# EAGLE board gemschematic_Chris_edits (EAGLE 9.6.2)
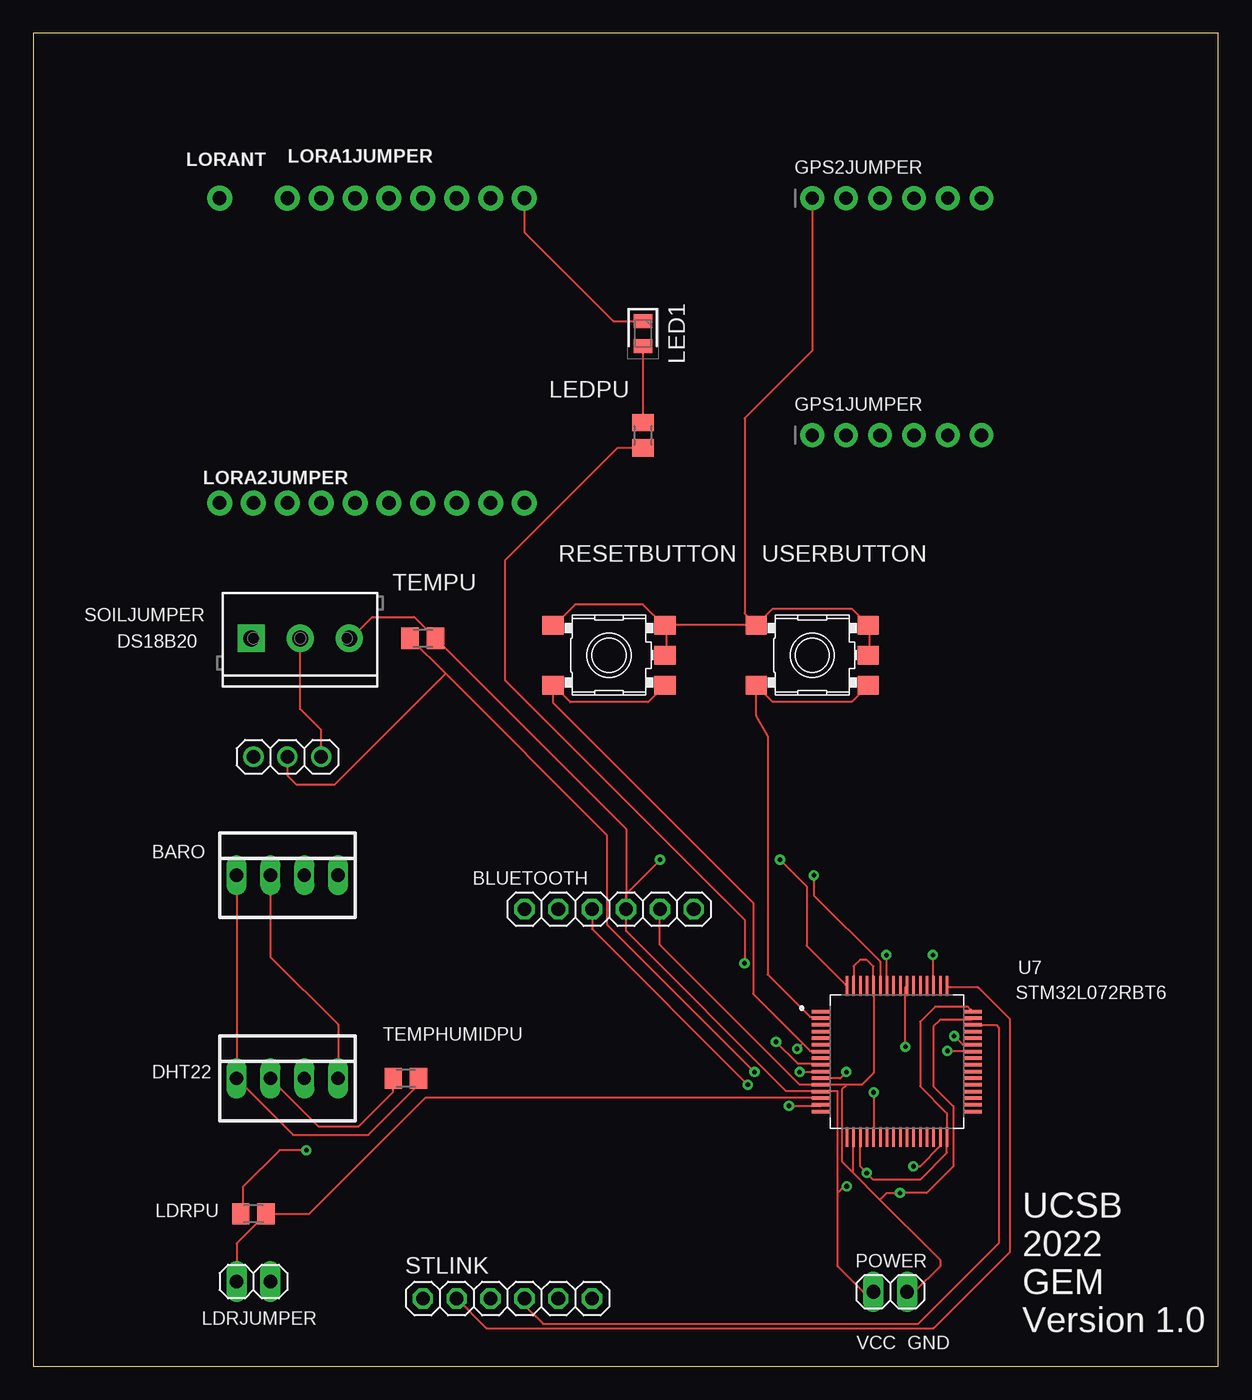
[diagram p0: board, top side]
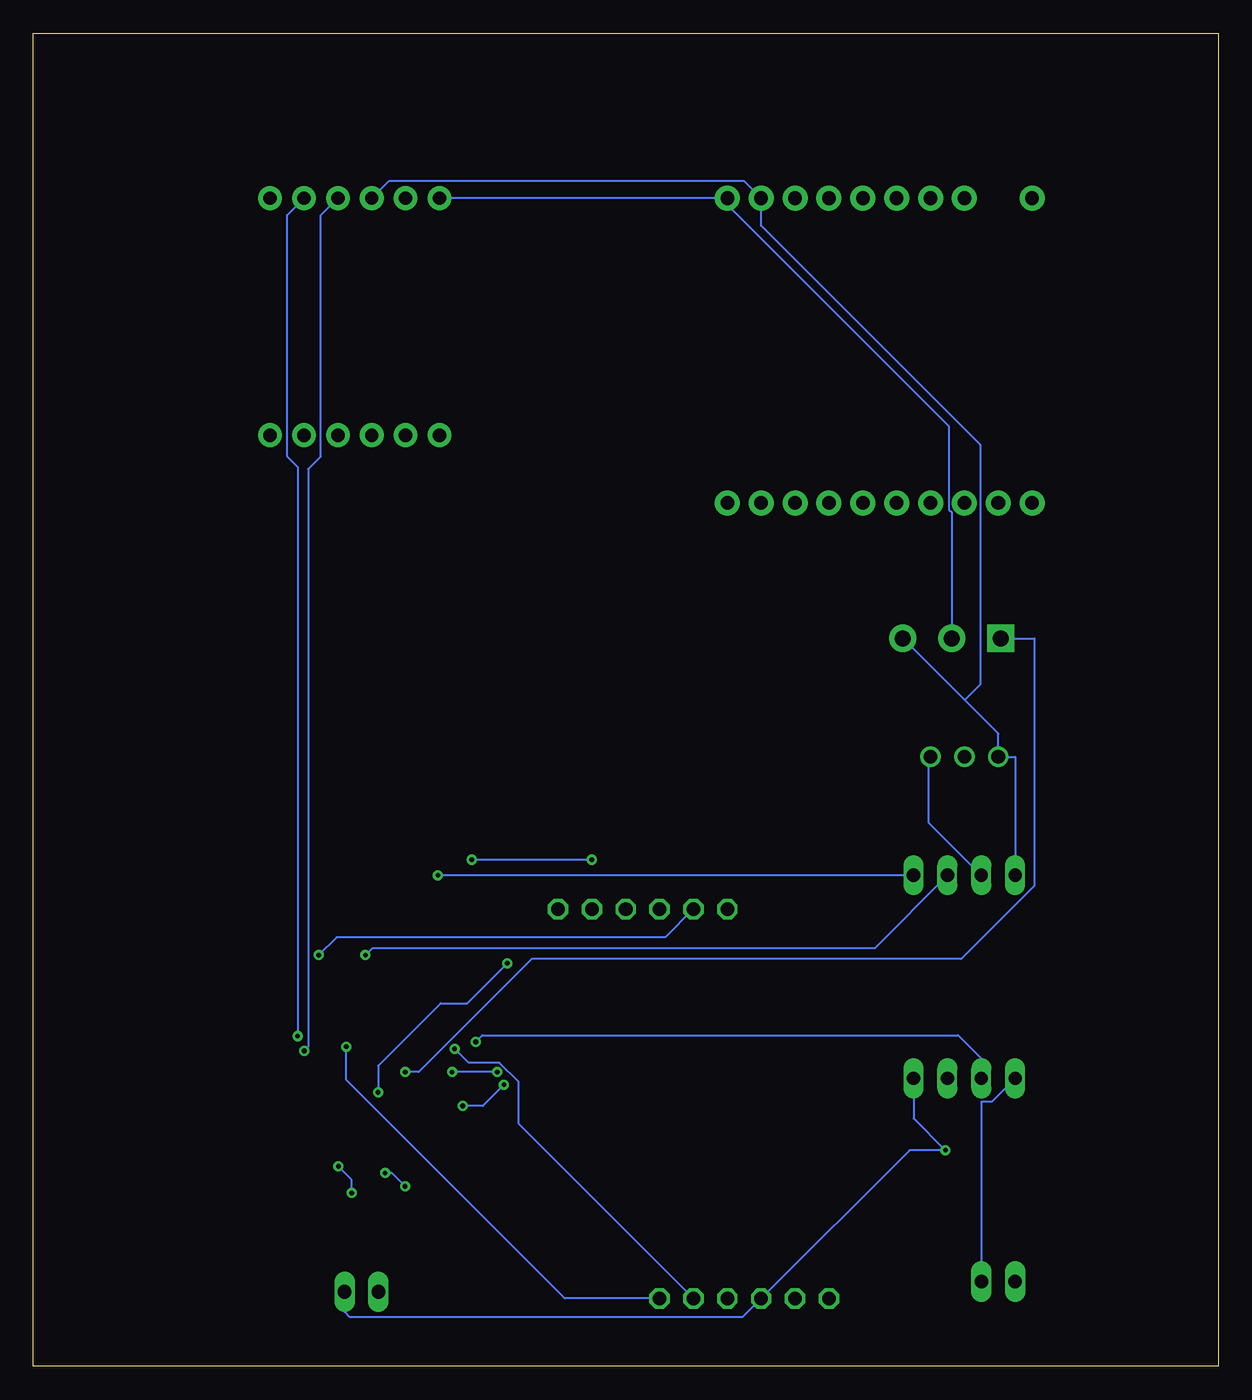
[diagram p1: board, bottom side, seen from below]

Size 88.88 x 100 mm. Coordinates in mm from the lower left corner, seen from the top.
Outline: 0,0 88.88,0 88.88,100 0,100 0,0
Copper layers (1*16): Top 0.035mm / dielectric 1.5mm / Bottom 0.035mm
Design rules "default": minimum track width 6mil, minimum drill 0.35mm, track to track 6mil, track to pad 6mil, pad to pad 6mil, via to via 6mil, smd to smd 6mil, copper to edge 40mil, drill to drill 6mil, minimum pad ring 10mil, minimum via ring 8mil, stop-mask expansion 4mil, vias tented up to drill 0mil, thermal gap 10mil
Net classes: 0 default: width 0.152 mm, drill 0.305 mm; 1 highpower: width 0.406 mm, drill 0.483 mm; 2 lowpower: width 0.305 mm, drill 0.483 mm

## Footprints (pad centres in the part's own frame; a part is rotated, then mirrored left to right if it is on the bottom)
22-23-2041 = drill 1 long: 1 -3.81,0; 2 -1.27,0; 3 1.27,0; 4 3.81,0
1X06 = drill 1.016 octagon: 1 -6.35,0; 2 -3.81,0; 3 -1.27,0; 4 1.27,0; 5 3.81,0; 6 6.35,0
1X03 = drill 1.016: 1 -2.54,0; 2 0,0; 3 2.54,0
1X06_ROUND_70 = drill 1 pad 1.778: 1 -6.35,0; 2 -3.81,0; 3 -1.27,0; 4 1.27,0; 5 3.81,0; 6 6.35,0
1X02 = drill 1.016 long: 1 -1.27,0; 2 1.27,0
M0805 = smd 1.3 x 1.6: 1 -0.95,0; 2 0.95,0
D-G080508G1-KS2_LEDC2012X85N = smd 1.05 x 1.4: 1 -0.95,0; 2 0.95,0
1X08_NO_SILK = drill 1.016 pad 1.88: 1 0,0; 2 2.54,0; 3 5.08,0; 4 7.62,0; 5 10.16,0; 6 12.7,0; 7 15.24,0; 8 17.78,0
1X10_NO_SILK = drill 1.016 pad 1.88: 1 0,0; 2 2.54,0; 3 5.08,0; 4 7.62,0; 5 10.16,0; 6 12.7,0; 7 15.24,0; 8 17.78,0; 9 20.32,0; 10 22.86,0
1X01_NO_SILK = drill 1.016 pad 1.88: 1 0,0
SKHMPXE010 = smd 1.6 x 1.4: 1 -4.2,2.25; 2 4.2,2.25; 3 -4.2,-2.25; 4 4.2,-2.25; 5 4.2,0
SCREWTERMINAL-3.5MM-3_LOCK.007S = drill 1.2 pad 2.032 square: 1 -0.178,0 | drill 1.2 pad 2.032: 2 3.5,0; 3 7.178,0
QFP50P1200X1200X160-64N = smd 1.47 x 0.25: 1 -5.67,3.75; 2 -5.67,3.25; 3 -5.67,2.75; 4 -5.67,2.25; 5 -5.67,1.75; 6 -5.67,1.25; 7 -5.67,0.75; 8 -5.67,0.25; 9 -5.67,-0.25; 10 -5.67,-0.75; 11 -5.67,-1.25; 12 -5.67,-1.75; 13 -5.67,-2.25; 14 -5.67,-2.75; 15 -5.67,-3.25; 16 -5.67,-3.75; 33 5.67,-3.75; 34 5.67,-3.25; 35 5.67,-2.75; 36 5.67,-2.25; 37 5.67,-1.75; 38 5.67,-1.25; 39 5.67,-0.75; 40 5.67,-0.25; 41 5.67,0.25; 42 5.67,0.75; 43 5.67,1.25; 44 5.67,1.75; 45 5.67,2.25; 46 5.67,2.75; 47 5.67,3.25; 48 5.67,3.75 | smd 0.25 x 1.47: 17 -3.75,-5.67; 18 -3.25,-5.67; 19 -2.75,-5.67; 20 -2.25,-5.67; 21 -1.75,-5.67; 22 -1.25,-5.67; 23 -0.75,-5.67; 24 -0.25,-5.67; 25 0.25,-5.67; 26 0.75,-5.67; 27 1.25,-5.67; 28 1.75,-5.67; 29 2.25,-5.67; 30 2.75,-5.67; 31 3.25,-5.67; 32 3.75,-5.67; 49 3.75,5.67; 50 3.25,5.67; 51 2.75,5.67; 52 2.25,5.67; 53 1.75,5.67; 54 1.25,5.67; 55 0.75,5.67; 56 0.25,5.67; 57 -0.25,5.67; 58 -0.75,5.67; 59 -1.25,5.67; 60 -1.75,5.67; 61 -2.25,5.67; 62 -2.75,5.67; 63 -3.25,5.67; 64 -3.75,5.67

## Placement (x,y rotation side)
BARO  22-23-2041  [22-23-2041]  19.05,36.83 0 top
BLUETOOTH  [1X06]  43.18,34.29 0 top
DHT22  22-23-2041  [22-23-2041]  19.05,21.59 0 top
DS18B20  [1X03]  19.05,45.72 0 top
GPS1JUMPER  [1X06_ROUND_70]  64.77,69.85 0 top
GPS2JUMPER  [1X06_ROUND_70]  64.77,87.63 0 top
LDRJUMPER  [1X02]  16.51,6.35 0 top
LDRPU  270  [M0805]  16.51,11.43 0 top
LED1  D-G080508G1-KS2_D-G080508G1-KS2  [D-G080508G1-KS2_LEDC2012X85N]  45.72,77.47 270 top
LEDPU  510 Ohm  [M0805]  45.72,69.85 90 top
LORA1JUMPER  [1X08_NO_SILK]  19.05,87.63 0 top
LORA2JUMPER  [1X10_NO_SILK]  13.97,64.77 0 top
LORANT  [1X01_NO_SILK]  13.97,87.63 0 top
POWER  [1X02]  64.27,5.58 0 top
RESETBUTTON  SKHMPSE010  [SKHMPXE010]  43.18,53.34 0 top
SOILJUMPER  [SCREWTERMINAL-3.5MM-3_LOCK.007S]  16.51,54.61 0 top
STLINK  [1X06]  35.56,5.08 0 top
TEMPHUMIDPU  4.7k  [M0805]  27.94,21.59 0 top
TEMPU  4.7k  [M0805]  29.21,54.61 0 top
U7  STM32L073RZT6  [QFP50P1200X1200X160-64N]  64.77,22.86 0 top
USERBUTTON  SKHMPSE010  [SKHMPXE010]  58.42,53.34 0 top

## Library data of the parts
BARO DHT22 = con-molex; MF: MOLEX; MPN: 22-23-2041; OC_FARNELL: 1462920; OC_NEWARK: 38C0355
BLUETOOTH DS18B20 LDRPU LEDPU STLINK TEMPHUMIDPU TEMPU = adafruit
GPS1JUMPER GPS2JUMPER = microbuilder
LDRJUMPER POWER = pinhead
LED1 = ce-capstone-2022; DESCRIPTION: Light Emitting Diodes (LED) Green 526~531nm 250~330mcd@5mA Top View 0805 RoHS; HEIGHT: 0.85mm; MANUFACTURER_NAME: Wuxi ARK Tech Elec; MANUFACTURER_PART_NUMBER: D-G080508G1-KS2
LORA1JUMPER = SparkFun-Connectors; PROD_ID: CONN-08438
LORA2JUMPER = SparkFun-Connectors; PROD_ID: CONN-11563
LORANT = SparkFun-Connectors
RESETBUTTON USERBUTTON = switch
SOILJUMPER = SparkFun-Connectors; PROD_ID: CONN-08288
U7 = STM32L073RZT6; AVAILABILITY: In Stock; DESCRIPTION: ARM® Cortex®-M0+ STM32L0 Microcontroller IC 32-Bit 32MHz 192KB (192K x 8) FLASH 64-LQFP (10x10); MF: STMicroelectronics; MP: STM32L073RZT6; PACKAGE: LQFP-64 STMicroelectronics; PRICE: None; PURCHASE-URL: https://pricing.snapeda.com/search/part/STM32L073RZT6/?ref=eda

## Nets
1PPS: GPS2JUMPER.2
BTRX: BLUETOOTH.2 U7.51
BTTX: BLUETOOTH.3 U7.15
GND: BARO.2 BLUETOOTH.5 DHT22.4 DS18B20.3 GPS2JUMPER.1 LDRPU.1 LED1.1 LORA1JUMPER.8 POWER.2 RESETBUTTON.1 RESETBUTTON.2 RESETBUTTON.5 SOILJUMPER.2 STLINK.3 U7.12 U7.18 U7.31 U7.47 U7.60 U7.63 USERBUTTON.1 USERBUTTON.2 USERBUTTON.5
GPSRX: GPS2JUMPER.4 U7.42
GPSTX: GPS2JUMPER.5 U7.43
LED: LEDPU.1 U7.21
N$1: LED1.2 LEDPU.2
NRST: RESETBUTTON.3 RESETBUTTON.4 STLINK.5 U7.7
PA0LDR: LDRJUMPER.1 LDRPU.2 U7.14
PC1DHT: DHT22.2 TEMPHUMIDPU.1 U7.9
PC2DS18B20: DS18B20.2 TEMPU.1 U7.10
PC3SOIL: SOILJUMPER.1 U7.11
SCLBARO: BARO.3 U7.58
SDABARO: BARO.4 U7.59
SWCLKSTLINK: STLINK.2 U7.49
SWDIOSTLINK: STLINK.4 U7.46
SWOSTLINK: STLINK.6 U7.55
USERBUTTON: U7.2 USERBUTTON.3 USERBUTTON.4
VCC: BARO.1 BLUETOOTH.4 DHT22.1 DS18B20.1 GPS2JUMPER.3 LDRJUMPER.2 LORA1JUMPER.7 POWER.1 SOILJUMPER.3 TEMPHUMIDPU.2 TEMPU.2 U7.13 U7.19 U7.32 U7.48 U7.64
VLCD: U7.1

## Tracks (layer width: path | path; a pad name or v marks a point on that pad's centre or on a via)
BTRX  (via drill 0.35)
  Top 0.152: v67.47,30.84 67.47,28.57 U7.51
  Bottom 0.152: v67.47,30.84 66.14,32.18 41.48,32.18 BLUETOOTH.2
BTTX  (via drill 0.35)
  Top 0.152: v56.67,19.53 59.05,19.53 U7.15 | BLUETOOTH.3 41.91,32.79 v53.59,21.11
  Bottom 0.152: v53.59,21.11 55.17,19.53 v56.67,19.53
GND  (via drill 0.35)
  Top 0.152: BLUETOOTH.5 46.99,31.59 57.47,21.11 59.05,21.11 U7.12 59.21,21.11 61,21.11 | DS18B20.3 21.59,47.72 20.01,49.3 SOILJUMPER.2 | v20.48,16.21 18.48,16.21 15.72,13.45 15.72,11.43 LDRPU.1 | USERBUTTON.5 62.71,53.34 62.71,55.56 USERBUTTON.2 61.38,56.83 55.46,56.83 USERBUTTON.1 | RESETBUTTON.1 39.05,55.56 40.64,57.15 45.72,57.15 47.28,55.59 RESETBUTTON.2 | RESETBUTTON.2 47.47,55.5 47.47,53.43 RESETBUTTON.5 | GPS2JUMPER.1 58.42,76.2 53.34,71.12 53.34,56.47 USERBUTTON.1 | USERBUTTON.1 RESETBUTTON.2 | LORA1JUMPER.8 36.83,85.09 43.5,78.42 LED1.1 | 61,21.11 62.11,21.11 63.02,22.02 63.02,28.42 U7.60 63,28.55 63,30 62.5,30.5 62,30.5 61.52,30.02 U7.63 | 61,21.11 60.64,20.76 60.64,15.35 61.5,14.5 | 61.5,14.5 63.5,12.5 | 63.5,12.5 67.49,8.5 67.5,8.5 68,8 68,7.5 66.08,5.58 POWER.2 | DHT22.4 22.86,25.64 17.78,30.72 BARO.2 | 61.5,14.5 61.5,17.17 U7.18 | 63.5,12.5 64,13 v65,13 67,13 69,15 69,19.5 67.5,21 67.5,25.5 68,26 70.33,26 U7.47 | v66,15 66.5,15 68.02,16.52 U7.31
  Bottom 0.152: GPS2JUMPER.1 LORA1JUMPER.8 36.83,87.13 20.22,70.52 20.22,64.29 20.01,64.08 SOILJUMPER.2 | BARO.2 21.75,40.8 21.75,45.72 DS18B20.3 | DHT22.4 22.86,18.59 v20.48,16.21 23.16,16.21 STLINK.3 35.7,3.67 65.14,3.67 65.54,4.08 POWER.2 | v65,13 65,14 v66,15
GPSRX  (via drill 0.35)
  Top 0.152: v68.56,23.65 70.33,23.65 U7.42
  Bottom 0.152: v68.56,23.65 68.26,23.95 68.26,67.31 67.31,68.26 67.31,86.36 GPS2JUMPER.4
GPSTX  (via drill 0.35)
  Top 0.152: v69.06,24.77 69.69,24.13 70.33,24.13 U7.43
  Bottom 0.152: v69.06,24.77 69.06,67.47 69.85,68.26 69.85,86.36 GPS2JUMPER.5
LED  (via drill 0.35)
  Top 0.152: v63.02,20.54 63.02,17.3 U7.21 | v53.34,30.23 53.34,33.5 35.4,51.44 35.4,60.48 43.82,68.9 LEDPU.1
  Bottom 0.152: v63.02,20.54 63.02,22.54 58.34,27.23 56.34,27.23 v53.34,30.23
N$1
  Top 0.152: LED1.2 LEDPU.2
NRST  (via drill 0.35)
  Top 0.152: 57.69,24.22 53.98,27.94 53.98,34.77 38.98,49.76 RESETBUTTON.3 40.25,49.82 46.11,49.82 RESETBUTTON.4 | 57.69,24.22 58.26,23.65 59.05,23.65 U7.7 | 57.69,24.22 v57.28,23.81
  Bottom 0.152: v57.28,23.81 56.24,22.76 53.93,22.76 52.48,21.32 52.48,18.19 STLINK.5
PA0LDR
  Top 0.152: LDRPU.2 20.68,11.43 29.42,20.16 59.05,20.16 U7.14 | LDRJUMPER.1 15.24,9.21 LDRPU.2 | LDRPU.2
PC1DHT  (via drill 0.35)
  Top 0.152: v55.7,24.34 57.33,22.7 59.05,22.7 U7.9 | DHT22.2 21.37,18 24.4,18 26.99,20.59 TEMPHUMIDPU.1
  Bottom 0.152: v55.7,24.34 55.2,24.84 19.53,24.84 17.78,23.09 DHT22.2
PC2DS18B20  (via drill 0.35)
  Top 0.152: v57.47,22.07 59.05,22.07 U7.10 | v54.09,22.07 43.02,33.13 43.02,39.85 30.91,51.95 | 30.91,51.95 TEMPU.1 | DS18B20.2 19.05,44.33 19.77,43.61 22.57,43.61 30.91,51.95
  Bottom 0.152: v54.09,22.07 v57.47,22.07
PC3SOIL  (via drill 0.35)
  Top 0.152: v60.98,22.07 60.51,21.59 59.21,21.59 U7.11
  Bottom 0.152: v60.98,22.07 59.98,22.07 51.51,30.54 19.3,30.54 13.81,36.04 13.81,54.61 SOILJUMPER.1
SCLBARO  (via drill 0.35)
  Top 0.152: v63.98,30.84 63.98,28.57 U7.58
  Bottom 0.152: v63.98,30.84 63.46,31.36 25.79,31.36 BARO.3
SDABARO  (via drill 0.35)
  Top 0.152: v58.54,36.83 58.54,35.33 63.5,30.37 63.5,28.57 U7.59
  Bottom 0.152: BARO.4 v58.54,36.83
SWCLKSTLINK
  Top 0.152: STLINK.2 33.97,2.86 67.52,2.86 73.25,8.6 73.25,26.01 70.85,28.42 68.58,28.42 U7.49
SWDIOSTLINK
  Top 0.152: STLINK.4 36.83,4.58 38.23,3.17 66.36,3.17 72.44,9.26 72.44,25.4 72.28,25.56 70.48,25.56 U7.46
SWOSTLINK  (via drill 0.35)
  Top 0.152: v65.41,23.97 65.41,28.42 U7.55
  Bottom 0.152: v65.41,23.97 65.41,21.47 49.01,5.08 STLINK.6
USERBUTTON
  Top 0.152: U7.2 59.05,26.19 58.26,26.19 55.06,29.39 55.06,47.27 54.22,48.79 USERBUTTON.3 55.46,49.85 61.38,49.85 USERBUTTON.4
VCC  (via drill 0.35)
  Top 0.152: 60.33,13 60.33,7.49 62.23,5.58 POWER.1 | 60.33,13 60.33,20.64 59.21,20.64 U7.13 59.05,20.64 56.47,20.64 44.45,32.66 BLUETOOTH.4 | TEMPHUMIDPU.2 28.73,21.59 28.73,20.95 25.12,17.34 19.49,17.34 DHT22.1 BARO.1 | SOILJUMPER.3 23.81,54.61 25.42,56.22 28.55,56.22 TEMPU.2 44.45,40.32 BLUETOOTH.4 | 60.33,13 60.83,13.5 v61,13.5 | U7.19 62.02,14.98 v62.5,14.5 63,14 66.5,14 68.52,16.02 U7.32 68.52,18.98 66.5,21 66.5,25.84 67.63,26.96 70.09,26.96 U7.48 | BLUETOOTH.4 44.45,35.45 v47,38 | v56,38 58,36 58,31.55 U7.64
  Bottom 0.152: GPS2JUMPER.3 62.23,88.9 35.56,88.9 LORA1JUMPER.7 34.29,85.57 17.86,69.14 17.86,51.14 19.02,49.98 | LDRJUMPER.2 17.78,19.84 16.99,19.84 DHT22.1 | BARO.1 15.24,45.72 DS18B20.1 16.51,47.47 19.02,49.98 | 19.02,49.98 23.65,54.61 SOILJUMPER.3 | v61,13.5 62,14.5 v62.5,14.5 | v47,38 v56,38

## Text on the board
tNames: STM32L072RBT6 | UCSB / 2022 / GEM / Version 1.0 | VCC | GND